# Altium PCB Mako DSP Pro R1.0.PcbDoc (part 2 of 2)
Units mil, origin at the board's own origin, x right, y up, seen from the top; angles counter-clockwise.
Board outline 4040 x 2100 mil, 4 copper layers (Top Layer, GND, Power, Bottom Layer); 159 components, 101 nets, 707 pads, 150 vias.
Unrouted connection lines stored in the file: 172.
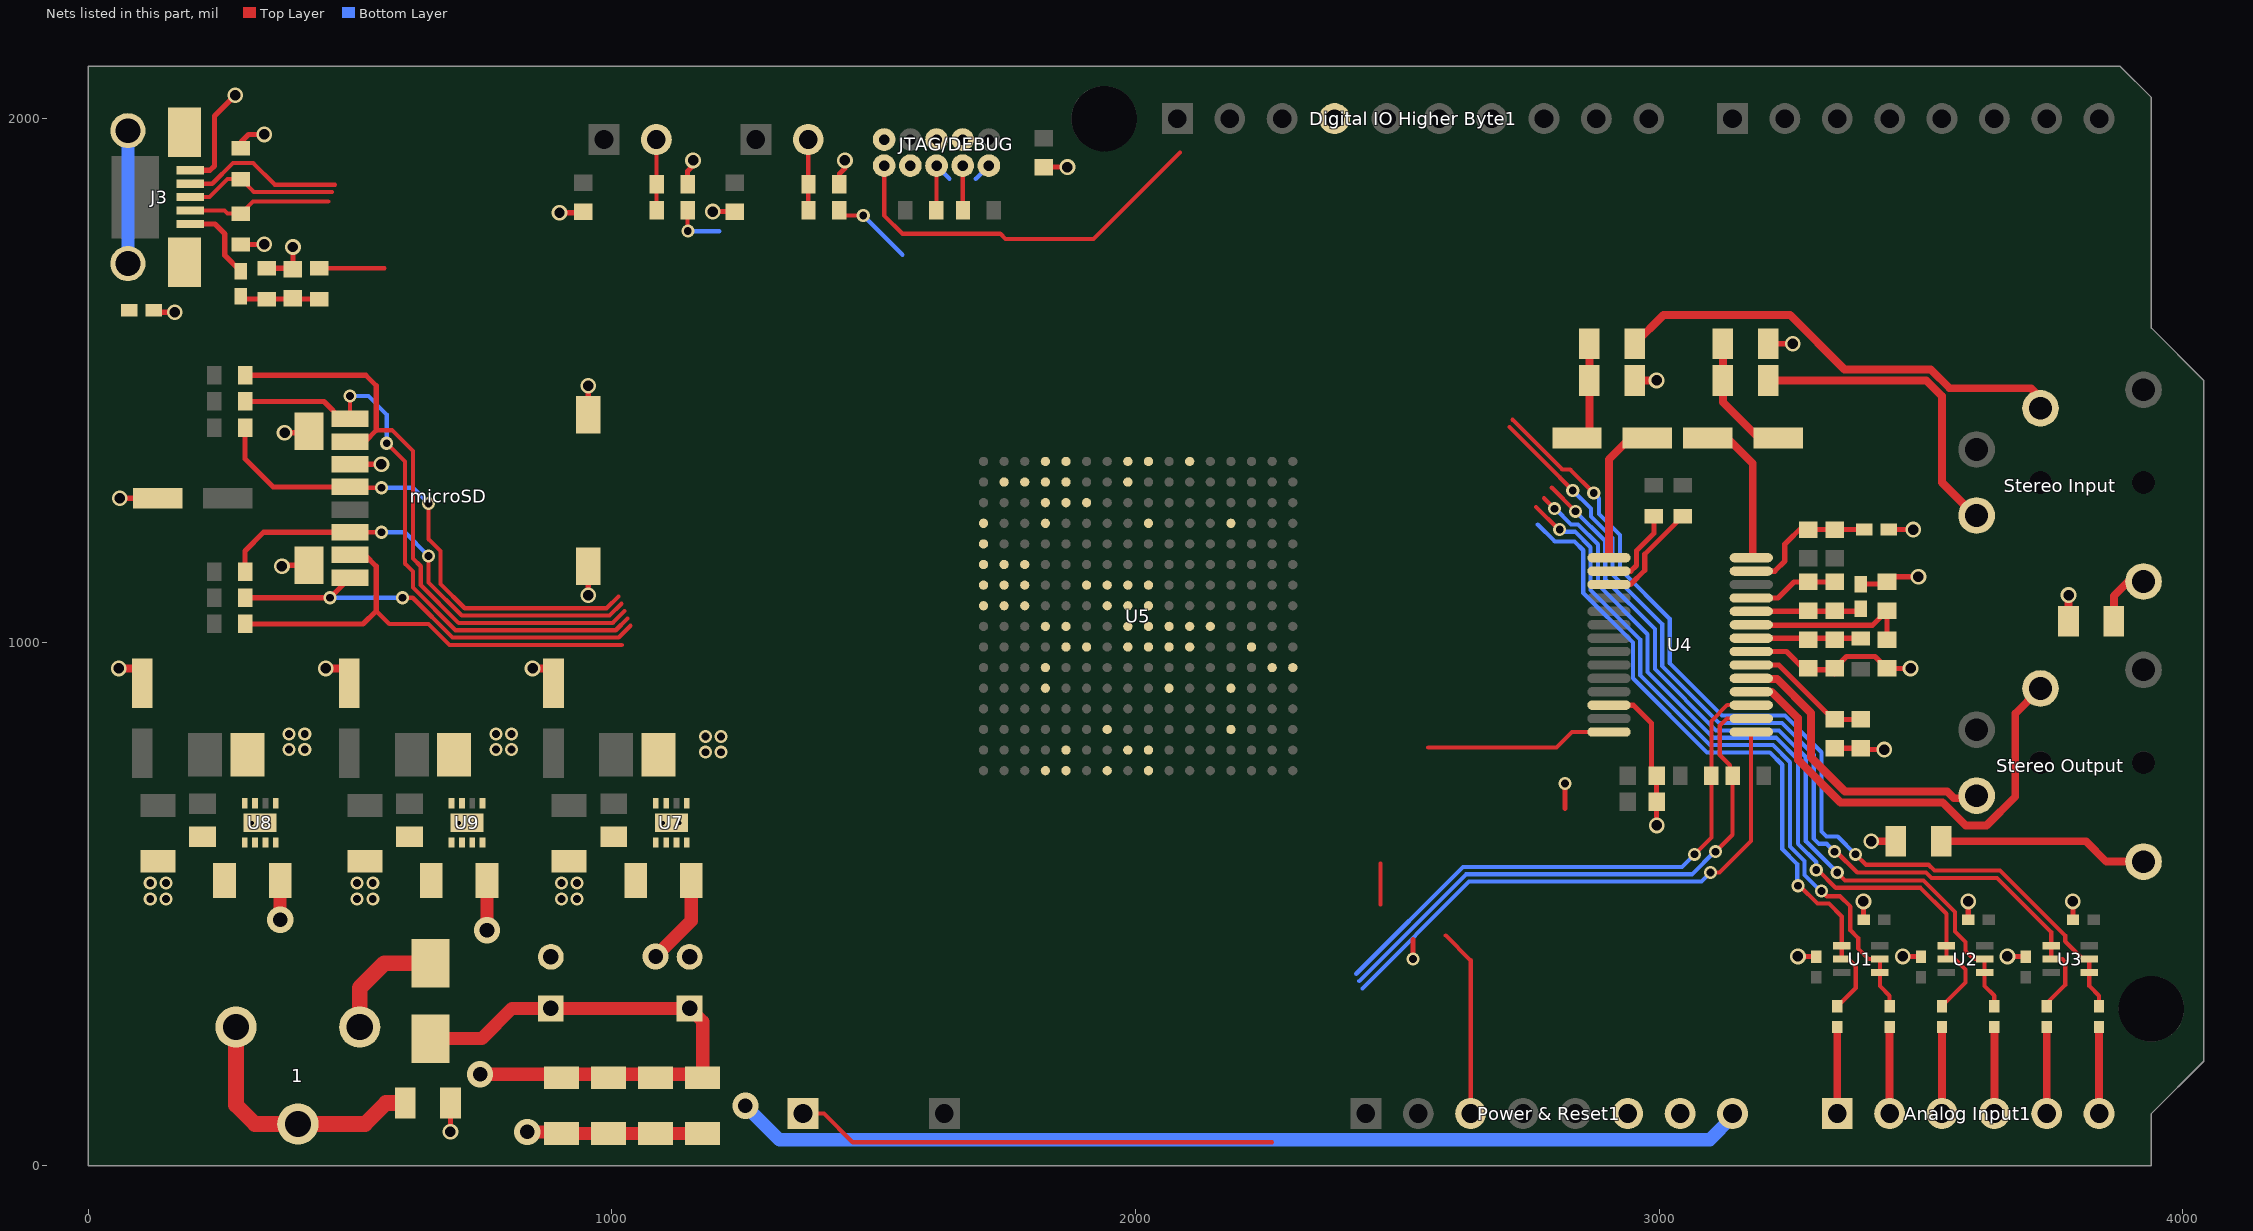
[diagram p4: the nets of this part, all layers, seen from the top]

## Via types
v1: diameter 30, hole 20, Top Layer to Bottom Layer, 78 vias
v2: diameter 25, hole 15, Top Layer to Bottom Layer, 56 vias
v3: diameter 50, hole 28, Top Layer to Bottom Layer, 10 vias
v4: diameter 19.68, hole 7.87, Top Layer to Bottom Layer, 6 vias

## Nets (pads, with @x,y where several pads share a name; then routed paths per layer and width w, separated by ;. In a path a pad name is that pad's centre, name@x,y a point inside that pad or via, vN(x,y) a via of type N, cw(c..) or ccw(c..) an arc to the next point about the centre after c; other vN are vias at no path point) (continued)
GND: "Digital IO Higher Byte1.4" "Power & Reset1.6" "Power & Reset1.7" C1.1 C2.1 C3.1 C4.1 C5.1 C6.1 C7.1 C8.1 C9.1 C12.1 C13.1 C16.1 C17.1 C18.1 C19.1 C21.1 C23.1 C24.1 C25.1 C26.1 C27.1 C28.1 C29.1 C30.2 C31.1 C32.2 C35.1 C36.1 C37.1 C38.1 C39.1 C40.1 C41.1 C42.1 C43.1 C44.1 C45.1 C46.1 C47.1 C48.1 C49.1 C50.1 C51.2 C52.2 C53.1 C54.1 C55.2 C56.1 C57.1 C58.2 C59.1 C60.1 C61.2 C62.1 C63.1 C64.1 C65.1 C66.1 C67.1 C68.1 C69.1 C70.1 C71.1 C72.1 C73.1 C74.1 C75.1 C76.1 C77.1 FB3.2 FB4.2 FB6.1 FB12.2 FB13.2 FB14.2 FB15.2 FB16.1 FB17.2 J3.5 JTAG/DEBUG.3 JTAG/DEBUG.5 JTAG/DEBUG.9 microSD.6 microSD.9 microSD.10 microSD.11 microSD.12 R8.1 R14.1 R16.1 R29.2 R32.2 R33.2 R47.1 Reset.2 U4.12 U4.21 U5.C4 U5.D13 U5.G6 U5.G7 U5.G8 U5.G9 U5.H7 U5.H8 U5.H9 U5.J8 U5.J9 U5.J10 U5.J11 U5.K8 U5.K9 U5.K10 U5.M13 U5.P7 U5.P13 U7.1 U7.4 U7.5 U7.9 U8.1 U8.4 U8.5 U8.9 U9.1 U9.4 U9.5 U9.9 U10.3 X1.2 X1.4 | length 3259.7
  Top Layer w10: v1(60,1275) C71.1@132.99,1275 ; FB12.2@129.17,1630 v1(165,1630) ; J3.5@195,1901.18 232.4,1901.18 240.96,1909.74 240.96,2004.74 v1(280.96,2044.74) ; R32.2@291.54,1943.54 291.54,1955.31 305.96,1969.74 v1(335.96,1969.74) ; R33.2@291.79,1759.74 v1(335.96,1759.74) ; R29.2@340.96,1714.27 388.99,1714.27 C68.1@390.96,1712.3 v1(390.96,1754.74) ; v1(370,1144.92) 372.05,1146.97 microSD.11@421.54,1146.97 ; v1(375,1399.92) 418.58,1399.92 microSD.12@421.54,1402.87 ; v1(560,1339.92) microSD.6@500.28,1339.88 ; v1(691.79,65) FB16.1@691.79,120 ; v1(900,1820) C27.1@942.56,1820 ; v1(955,1089.92) microSD.9@955,1145 ; microSD.10@955,1434.37 v1(955,1489.92) ; R14.1@1144.53,1875 1144.53,1899.53 1155,1910 v1(1155,1920) ; v1(1170,2555) R47.1@1214.53,2555 ; v1(1192.44,1822.44) C28.1@1235,1822.44 ; U10.3@1297.48,2505 v1(1380,2505) ; R16.1@1434.53,1875 1434.53,1894.53 1445,1905 v1(1445,1920) ; v1@1527.56,2405 C64.1@1570,2447.44 ; C63.1@1622.56,2555 C62.1@1622.56,2610 1650,2637.44 v1(1650,2645) ; v1(1685,2400) C50.1@1685,2437.56 ; C26.1@1747.56,2620 v1(1790,2620) ; C32.2@1825,1907.44 v1(1870,1907.44) ; v2(2530,395) 2530,432.56 ; 2820,682.72 v2(2820,730) ; U4.12@2904.17,879.84 2950.47,879.84 2985.16,845.16 2985.16,755.28 C8.1@2995.12,745.31 C9.1@2995.12,695.31 v1@2995.12,650.2 ; U4.21@3175.83,982.2 3242.8,982.2 3277.44,947.56 3327.44,947.56 C13.1@3335,940 ; C23.1@3213.31,1570 v1(3255,1570) ; v1(3265,400) 3299.69,400 C2.1@3300,399.68 ; C18.1@3335,797.44 C19.1@3385,797.44 ; C13.1@3335,950 3357.81,972.81 3412.19,972.81 C17.1@3435,950 v1(3480,950) ; FB17.2@3385,1111.18 3431.06,1111.18 C16.1@3435,1115.12 3445.04,1125.16 v1(3495.16,1125.16) ; C19.1@3387.44,795 v1(3430,795) ; v1(3390,505) 3390,470.32 C1.1@3390.31,470 ; FB13.2@3438.78,1215.16 v1(3485.16,1215.16) ; v1(3465,400) 3499.69,400 C4.1@3500,399.68 ; v1(3590,505) 3590,470.32 C3.1@3590.31,470 ; v1(3665,400) 3699.69,400 C6.1@3700,399.68 ; v1(3790,505) 3790,470.32 C5.1@3790.31,470 ; microSD.6@500.28,1339.88 microSD.6@500.28,1339.88
  Top Layer w15: v1(58.48,950) C58.2@103.48,950 ; v1(453.48,950) C61.2@503.48,950 ; v1(848.48,950) C55.2@888.48,950 ; C21.1@2953.31,1500 v1(2995,1500) ; v1(3405,620) FB15.2@3446.69,620 ; FB14.2@3781.69,1040 v1(3781.69,1090)
  Top Layer w25: v3(838.48,65) C74.1@900.33,65 ; C74.1@903.48,61.85 C7.1@993.48,61.85 C72.1@1083.48,61.85 C73.1@1173.48,61.85
  other v1: 2995.16,650.16 1520,2405
  other v2: 118.48,510 148.48,510 513.48,510 543.48,510 903.48,510 933.48,510 118.48,540 148.48,540 513.48,540 543.48,540 903.48,540 933.48,540 1178.48,790 1208.48,790 383.48,795 413.48,795 778.48,795 808.48,795 1178.48,820 1208.48,820 383.48,825 413.48,825 778.48,825 808.48,825
  other v4: 312.73,655 344.23,655 707.73,655 739.23,655 1097.73,655 1129.23,655
I2C_CLK: R1.1 U4.17 U5.K11 | length 1097.1
  Top Layer w8: v2(3067.72,595) 3099.69,626.96 R1.1@3099.69,745.16 3099.69,849.68 3129.84,879.84 U4.17@3175.83,879.84
  Bottom Layer w8: 2421.6,367 2625.42,570.82 3043.54,570.82 v2(3067.72,595)
I2C_DATA: R2.1 U4.16 U5.J12 | length 1100.6
  Top Layer w8: v2(3107.72,600) 3140.16,632.44 R2.1@3140.16,745.16 ; R2.1@3135.16,755.16 3135.16,765.16 3115.69,784.63 3115.69,840.68 3129.25,854.25 U4.16@3175.83,854.25
  Bottom Layer w8: 2427.4,353 2631.22,556.82 3062.72,556.82 3105.9,600 v2(3107.72,600)
LATCH_ENABLE: U4.15 U5.K14 | length 1067.2
  Top Layer w8: v2(3097.72,560) 3115,560 3175.16,620.16 3175.16,827.99 U4.15@3175.83,828.66
  Bottom Layer w8: 2433.2,339 2637.02,542.82 3080.54,542.82 v2(3097.72,560)
MODE: U4.14 U5.M10 | length 357.4
  Top Layer w8: 2559.05,799.05 2804.05,799.05 2833.66,828.66 U4.14@2904.17,828.66
Net1_1: 1.1 D2.2 | length 229.4
  Top Layer w30: 1.1@518.48,265 518.48,340 565.33,386.85 D2.2@653.48,386.85
Net1_2: 1.2 1.3 FB16.2 | length 503.3
  Top Layer w30: 1.2@282.26,265 282.26,116.22 318.52,79.96 1.3@400.37,79.96 528.44,79.96 568.48,120 FB16.2@605.17,120
"NetAnalog Input1_1": "Analog Input1.1" R34.1 | length 165.3
  Top Layer w15: 3340,100 R34.1@3340,265.32
"NetAnalog Input1_2": "Analog Input1.2" R35.1 | length 165.3
  Top Layer w15: 3440,100 R35.1@3440,265.32
"NetAnalog Input1_3": "Analog Input1.3" R36.1 | length 165.3
  Top Layer w15: 3540,100 R36.1@3540,265.32
"NetAnalog Input1_4": "Analog Input1.4" R37.1 | length 165.3
  Top Layer w15: 3640,100 R37.1@3640,265.32
"NetAnalog Input1_5": "Analog Input1.5" R38.1 | length 165.3
  Top Layer w15: 3740,100 R38.1@3740,265.32
"NetAnalog Input1_6": "Analog Input1.6" R39.1 | length 165
  Top Layer w15: 3840,100 R39.1@3840,265
NetC10_1: C10.1 C11.1 FB13.1 U4.27 | length 260.6
  Top Layer w10: U4.27@3175.83,1135.75 3220.56,1135.75 3240,1155.19 3240,1187.56 C10.1@3275,1222.56 ; C10.1@3285,1215.12 3285.04,1215.16 FB13.1@3391.54,1215.16
NetC12_2: C12.2 C13.2 R3.1 U4.22 | length 209.5
  Top Layer w10: U4.22@3175.83,1007.8 3384.29,1007.8 R3.1@3385,1007.09
NetC14_1: C14.1 C15.1 FB17.1 U4.24 | length 209.2
  Top Layer w10: U4.24@3175.83,1058.98 FB17.1@3385,1058.98
NetC14_2: C14.2 C15.2 U4.25 | length 171.8
  Top Layer w10: U4.25@3175.83,1084.57 3227.01,1084.57 3257.56,1115.12 C15.2@3335,1115.12
NetC16_2: C16.2 C17.2 U4.23 | length 325.8
  Top Layer w10: U4.23@3175.83,1033.39 3176.65,1032.56 3407.56,1032.56 C16.2@3435,1060 C17.2@3435,1005.12
NetC18_2: C18.2 C19.2 U4.20 | length 252.3
  Top Layer w10: U4.20@3175.83,956.61 3228.39,956.61 3270,915 3332.46,852.56 C19.2@3385,852.56
NetC20_1: C20.1 U4.1 | length 277.5
  Top Layer w15: U4.1@2904.17,1161.34 2904.17,1349.17 2945,1390 C20.1@2976.93,1390
NetC20_2: C20.2 C21.2 R4.1 | length 181.5
  Top Layer w15: C20.2@2863.07,1390 2866.69,1393.62 C21.2@2866.69,1500 R4.1@2866.69,1570
NetC22_1: C22.1 U4.28 | length 286.9
  Top Layer w15: C22.1@3093.07,1390 3130,1390 3178.66,1341.34 3178.66,1164.17 U4.28@3175.83,1161.34
NetC22_2: C22.2 C23.2 R5.1 | length 245.2
  Top Layer w15: C23.2@3121.69,1570 3121.69,1458.31 3190,1390 C22.2@3226.93,1390
NetC24_2: C24.2 FB2.2 U5.F3
NetC25_2: C25.2 FB1.2 U5.G3
NetC30_1: C30.1 U5.E1 X1.3
NetC31_2: C31.2 U5.D1 X1.1
NetC63_2: C63.2 C64.2 FB7.1 U10.6 U10.8 | length 372.5
  Top Layer w8: U10.6@1473.13,2505 1440,2505 1420,2525 1420,2575 1450,2605 U10.8@1482.52,2605 ; U10.6@1482.52,2505 1567.56,2505 1567.56,2554.88 C63.2@1567.44,2555 ; C64.2@1570,2502.56 FB7.1@1621.06,2502.56
NetC68_2: C68.2 FB10.1 R27.1 R29.1 | length 152.4
  Top Layer w10: FB10.1@290.96,1661.12 296.87,1655.21 R29.1@340.96,1655.21 R27.1@440.96,1655.21
NetDBGEN1_2: DBGEN.2 R15.2 R16.2 | length 134.5
  Top Layer w8: R15.2@1375,1825.47 DBGEN.2@1375,1960
NetFB3_1: FB3.1 U5.G1
NetFB4_1: FB4.1 U5.H3
NetFB10_2: FB10.2 J3.1 | length 157.7
  Top Layer w10: J3.1@195,1798.82 241.88,1798.82 260.96,1779.74 260.96,1738.36 FB10.2@290.96,1708.36
NetFB12_1: FB12.1 J3.6 J3.7 J3.8 J3.9 | length 253.9
  Bottom Layer w25: J3.7@75.91,1723.03 J3.8@75.91,1976.97
NetFB14_1: "Stereo Input.5" FB14.1 | length 136.5
  Top Layer w15: FB14.1@3868.31,1040 3868.31,1088.31 3896.02,1116.02 3945,1116.02
NetFB15_1: "Stereo Output.5" FB15.1 | length 422.8
  Top Layer w15: FB15.1@3538.31,620 3815,620 3853.98,581.02 3945,581.02
NetJ3_4: J3.4 U5.H2 | length 309.9
  Top Layer w8: J3.4@195,1875.59 236.81,1875.59 276.22,1915 315,1915 356.26,1873.74 471.51,1873.74
NetL1_1: L1.1 U7.7
NetL2_1: L2.1 U8.7
NetL3_1: L3.1 U9.7
NetR4_2: "Stereo Input.4" R4.2 | length 891.5
  Top Layer w15: R4.2@2953.31,1570 3008.31,1625 3250,1625 3354,1521 3518.7,1521 3554.7,1485 3709.88,1485 3748.15,1446.73
NetR5_2: "Stereo Input.1" R5.2 | length 634.6
  Top Layer w15: R5.2@3208.31,1500 R5.2@3213.31,1500 ; R5.2@3213.31,1486.69 R5.2@3213.31,1500 ; 3626.1,1242.01 3602.99,1242.01 3540,1305 3540,1470 3510,1500 R5.2@3213.31,1500
NetR6_2: R6.2 U4.2 | length 164.6
  Top Layer w10: U4.2@2904.17,1135.75 2945.75,1135.75 2956.51,1146.51 2956.51,1174.61 2990,1208.1 R6.2@2990,1240.47
NetR7_2: R7.2 U4.3 | length 212.7
  Top Layer w10: U4.3@2904.17,1110.16 2945.16,1110.16 2972.51,1137.51 2972.51,1167.98 R7.2@3045,1240.47
NetR8_2: R8.2 U5.H1
NetR13_2: R13.2 R14.2 TRST.2 | length 134.5
  Top Layer w8: R13.2@1085,1825.47 TRST.2@1085,1960
NetR15_1: R15.1 U5.L4 | length 155.7
  Top Layer w8: R15.1@1434.53,1825 1444.53,1815 v2(1480,1815)
  Bottom Layer w8: v2(1480,1815) 1555,1740
NetR19_1: R19.1 U7.8
NetR20_1: R20.1 U8.8
NetR21_1: R21.1 U9.8
NetR34_2: R34.2 U1.1 U1.2 | length 1300.6
  Top Layer w8: v2(3265,535) 3268.18,535 3302.18,501 3324,501 3348.58,476.42 U1.1@3348.58,420.59 U1.2@3348.58,395 3361.07,395 3375.31,380.76 3375.31,340 R34.2@3340,304.69
  Bottom Layer w8: 2768.18,1225 2800.68,1192.5 2838.1,1192.5 2855,1175.6 2855,1094.2 2949.72,999.49 2949.72,931.29 3091.29,789.72 3211.29,789.72 3235,766.01 3235,605.2 3263.5,576.7 3263.5,536.5 v2(3265,535)
NetR35_2: R35.2 U1.4 U1.5 | length 1347.6
  Top Layer w8: 2765,1258.18 2808.18,1215 v2(2810,1215) ; v2(3310,525) 3320,515 3345,515 3365,495 3365,450 3380,435 3380,415 3400,395 U1.5@3421.42,395 U1.4@3421.42,369.41 3421.42,343.58 3440,325 R35.2@3440,304.69
  Bottom Layer w8: v2(2810,1215) 2813.9,1211.1 2839.3,1211.1 2869,1181.4 2869,1100 2963.72,1005.28 2963.72,937.09 3097.09,803.72 3217.09,803.72 3250,770.8 3250,610 3277.5,582.5 3277.5,555.68 3308.18,525 v2(3310,525)
NetR36_2: R36.2 U2.1 U2.2 | length 1507.9
  Top Layer w8: 2780,1275 v2(2800,1255) ; v2(3300,565) 3303.18,565 3337.18,531 3499,531 3548.58,481.42 U2.1@3548.58,420.59 U2.2@3548.58,395 3565,395 3585,375 3585,350 3540,305 R36.2@3540,304.69
  Bottom Layer w8: v2(2800,1255) 2801.82,1255 2831.72,1225.1 2845.1,1225.1 2883,1187.2 2883,1109.9 2977.72,1015.18 2977.72,942.89 3102.89,817.72 3222.89,817.72 3265,775.6 3265,615 3300,580 v2(3300,565)
NetR37_2: R37.2 U2.4 U2.5 | length 1511
  Top Layer w8: 2795,1295 v2(2840,1250) ; v2(3340,560) 3355,545 3505,545 3565,485 3565,447.8 3585,427.8 3585,410 3600,395 U2.5@3621.42,395 U2.4@3621.42,369.41 3621.42,343.58 3640,325 R37.2@3640,304.69
  Bottom Layer w8: v2(2840,1250) 2897,1193 2897,1119.8 2991.72,1025.08 2991.72,948.69 3108.69,831.72 3228.69,831.72 3280,780.4 3280,620 v2(3340,560)
NetR38_2: R38.2 U3.1 U3.2 | length 1804.4
  Top Layer w8: 2714.2,1411 2810,1315.2 2810,1315 v2(2835,1290) ; v2(3335,600) 3338.18,600 3378.18,560 3509.8,560 3519.8,550 3645,550 3748.58,446.42 U3.1@3748.58,420.59 U3.2@3748.58,395 3770,395 3775.31,389.68 3775.31,345.32 3740,310 R38.2@3740,304.69
  Bottom Layer w8: v2(2835,1290) 2869.9,1255.1 2869.9,1239.9 2911,1198.8 2911,1129.7 3005.72,1034.98 3005.72,954.49 3114.49,845.72 3234.49,845.72 3295,785.2 3295,625 3305,615 3320,615 v2(3335,600)
NetR39_2: R39.2 U3.4 U3.5 | length 1826.6
  Top Layer w8: 2720,1425 2815,1330 2830,1330 v2(2875,1285) ; v2(3375,595) 3395,575 3514.6,575 3525.6,564 3651,564 3775.31,439.68 3775.31,428.93 3809.24,395 U3.5@3821.42,395 U3.4@3821.42,369.41 3821.42,343.58 3840,325 R39.2@3840,304.69
  Bottom Layer w8: v2(2875,1285) 2885,1275 2885,1245 2905,1225 2905,1224.6 2925,1204.6 2925,1139.8 3020,1044.8 3020,960 3120,860 3240,860 3310,790 3310,638.44 3319.38,629.06 3340.94,629.06 v2(3375,595)
NetR40_2: microSD.1 R40.2 U5.T9 | length 831.4
  Top Layer w8: v2(600,1085) 619.8,1085 695.88,1008.92 1013.12,1008.92 1035.72,1031.52
  Top Layer w10: R40.2@299.53,1084.92 v2(461.85,1084.92) microSD.1@500.28,1123.35
  Bottom Layer w8: v2@461.93,1085 v2(600,1085)
  Bottom Layer w10: v2(461.85,1084.92) v2@461.93,1085
NetR41_2: microSD.2 R41.2 U5.R9 | length 900.4
  Top Layer w8: 550,1059.92 574.92,1035 650,1035 690.08,994.92 1018.92,994.92
  Top Layer w10: R41.2@299.53,1034.92 525,1034.92 550,1059.92 550,1144.92 528.27,1166.65 microSD.2@500.28,1166.65
NetR42_2: microSD.3 R42.2 U5.T4 | length 878
  Top Layer w8: microSD.3@500.28,1209.96 v2(560,1210) ; v2(650,1165) 650,1114.2 713.27,1050.92 995.72,1050.92 1018.32,1073.52
  Top Layer w10: R42.2@299.53,1134.92 299.53,1174.45 335.04,1209.96 microSD.3@500.28,1209.96
  Bottom Layer w8: v2(560,1210) 605,1210 v2(650,1165)
NetR43_2: microSD.5 R43.2 U5.D4 | length 974.6
  Top Layer w8: microSD.5@501.85,1295 v2(560,1295) ; v2(650,1265) 650,1196.82 672.5,1174.32 672.5,1111.49 719.07,1064.92 989.92,1064.92 1012.52,1087.52
  Top Layer w10: R43.2@299.53,1409.92 299.53,1350.39 353.35,1296.57 microSD.5@500.28,1296.57
  Bottom Layer w8: v2(560,1295) 620,1295 v2(650,1265)
NetR44_2: microSD.7 R44.2 U5.T7 | length 1179.3
  Top Layer w8: 550,1404.92 580.08,1404.92 620,1365 620,1160 635,1145 635,1109.4 707.48,1036.92 1001.52,1036.92 1024.12,1059.52
  Top Layer w10: R44.2@299.53,1509.92 530,1509.92 550,1489.92 550,1404.92 528.27,1383.19 microSD.7@500.28,1383.19
NetR45_2: microSD.8 R45.2 U5.R8 | length 1121.3
  Top Layer w8: microSD.8@500,1426.77 v2(500,1470) ; v2@577.5,1372.5 605,1345 605,1150 620,1135 620,1104.6 701.68,1022.92 1007.32,1022.92 1029.92,1045.52
  Top Layer w10: R45.2@299.53,1459.92 450.08,1459.92 microSD.8@485,1425
  Bottom Layer w8: v2(500,1470) 535,1470 570,1435 v2(570,1380)
NetRTCALARM1_1: RTCALARM1.1 U5.A11 | length 918.5
  Top Layer w8: RTCALARM1.1@1365,100 1405,100 1460,45 2260.7,45
"NetStereo Output1_1": "Stereo Output.1" U4.19 | length 594.9
  Top Layer w15: U4.19@3175.83,931.02 3176.85,930 3225,930 3290,865 3290,780 3355,715 3550,715 3562.99,702.01 3626.1,702.01
"NetStereo Output1_4": "Stereo Output.4" U4.18 | length 924.4
  Top Layer w15: U4.18@3175.55,905.16 U4.18@3175.83,905.43 3214.57,905.43 3265,855 3265,775.3 3346.3,694 3541.3,694 3585.3,650 3625,650 3680,705 3680,863.58 3723.15,906.73 3748.15,906.73
NetU5_A4: U5.A4
NetU5_A5: U5.A5
NetU5_A9: U5.A9
NetU5_B3: U5.B3
NetU5_B5: U5.B5
NetU5_C5: U5.C5
NetU5_C6: U5.C6
NetU5_L15: U5.L15
NetU5_L16: U5.L16
RESET: "Power & Reset1.3" C29.2 JTAG/DEBUG.10 R12.1 Reset.1 U5.D9 | length 1184.4
  Top Layer w8: JTAG/DEBUG.10@1520,1910 1520,1815 1555,1780 1741.82,1780 1751.82,1770 1920,1770 2085,1935 ; 2467.83,499.45 2467.83,577.17 ; 2592.56,440 2640,392.56 2640,100
RTCX1: C35.2 U5.A8 X2.1
RTCX2: C36.2 U5.B8 X2.2
TCK/SWDCLK: JTAG/DEBUG.4 R18.1 U5.J5 | length 84.5
  Top Layer w8: R18.1@1670,1825.47 JTAG/DEBUG.4@1670,1910
TDI: JTAG/DEBUG.8 U5.J4
TDO/SWO: JTAG/DEBUG.6 R17.1 U5.K5 | length 119.9
  Top Layer w8: R17.1@1620,1825.47 JTAG/DEBUG.6@1620,1910
  Bottom Layer w8: JTAG/DEBUG.6@1620,1910 1645,1885
TMS/SWDIO: JTAG/DEBUG.2 U5.K6 | length 35.4
  Bottom Layer w8: 1695,1885 JTAG/DEBUG.2@1720,1910
TRST: R13.1 U5.M4 | length 100.2
  Top Layer w8: R13.1@1144.53,1825 1144.53,1785.47 v2(1145,1785)
  Bottom Layer w8: v2(1145,1785) 1205,1785
USB0_N: J3.2 R33.1 U5.G2 | length 275.3
  Top Layer w8: J3.2@195,1824.41 260.09,1824.41 265.96,1818.54 R33.1@291.54,1818.54 314.73,1841.74 458.26,1841.74
USB0_P: J3.3 R32.1 U5.F2 | length 295.3
  Top Layer w8: J3.3@195,1850 231.47,1850 265.96,1884.49 R32.1@291.54,1884.49 316.28,1859.74 465.72,1859.74
USB0_PPWR: R47.2 U5.T5 U10.1 | length 86.4
  Top Layer w8: R47.2@1215,2614.53 1235.47,2614.53 1245,2605 U10.1@1297.48,2605
USB0_PPWR_FAULT: R22.2 U5.R5 U10.2 | length 101.3
  Top Layer w8: R22.2@1215,2509.53 1235.47,2530 1272.48,2530 U10.2@1297.48,2555
USB0_VBUS: FB7.2 R27.2 U5.F1 U6.1 U6.2 U6.4 U6.5 | length 347.4
  Top Layer w8: R27.2@440.96,1714.27 565.73,1714.27 ; FB7.2@1625,2451.38 1646.38,2451.38 1655,2460 1655,2480 1668.58,2493.58 U6.1@1694.41,2493.58 U6.2@1720,2493.58 U6.5@1720,2566.42 U6.4@1745.59,2566.42
VDDA: C33.2 C34.2 FB5.2 U5.B4
VIN: "Power & Reset1.8" C7.2 C51.1 C52.1 C53.2 C56.2 C59.2 C72.2 C73.2 C74.2 D2.1 U7.2 U7.3 U8.2 U8.3 U9.2 U9.3 | length 3353.2
  Top Layer w25: v3(366.63,470) C56.2@366.63,545 ; D2.1@653.48,243.15 751.63,243.15 809.27,300.79 C52.1@883.48,300.79 C51.1@1148.48,300.79 1173.48,275.79 C73.2@1173.48,168.15 ; v3(748.48,175) C73.2@1166.63,175 ; v3(761.63,450) C59.2@761.63,545 ; v3(1083.48,400) 1151.63,468.15 C53.2@1151.63,545
  Bottom Layer w25: v3(1255,115) 1320,50 3096.5,50 3140,93.5
VSSA: C33.1 C34.1 FB6.2 U5.B2
pads on no net: "Digital IO Higher Byte1.1" "Digital IO Higher Byte1.2" "Digital IO Higher Byte1.3" "Digital IO Higher Byte1.5" "Digital IO Higher Byte1.6" "Digital IO Higher Byte1.7" "Digital IO Higher Byte1.8" "Digital IO Higher Byte1.9" "Digital IO Higher Byte1.10" "Digital IO Lower Byte1.1" "Digital IO Lower Byte1.2" "Digital IO Lower Byte1.3" "Digital IO Lower Byte1.4" "Digital IO Lower Byte1.5" "Digital IO Lower Byte1.6" "Digital IO Lower Byte1.7" "Digital IO Lower Byte1.8" "Power & Reset1.1" "Stereo Input.3" "Stereo Input.6" "Stereo Input." "Stereo Output.3" "Stereo Output.6" "Stereo Output." J3.GND JTAG/DEBUG.1@1795.59,1991.5 JTAG/DEBUG.7 U5.A1 U5.A2 U5.A3 U5.A6 U5.A7 U5.A10 U5.A12 U5.A13 U5.A14 U5.A15 U5.A16 U5.B1 U5.B6 U5.B7 U5.B9 U5.B11 U5.B12 U5.B13 U5.B15 U5.B16 U5.C1 U5.C2 U5.C3 U5.C7 U5.C8 U5.C9 U5.C10 U5.C11 U5.C13 U5.C14 U5.C15 U5.C16 U5.D2 U5.D3 U5.D5 U5.D6 U5.D8 U5.D10 U5.D11 U5.D12 U5.D14 U5.D15 U5.D16 U5.E2 U5.E3 U5.E4 U5.E5 U5.E6 U5.E7 U5.E8 U5.E9 U5.E10 U5.E11 U5.E13 U5.E14 U5.E15 U5.E16 U5.F4 U5.F5 U5.F6 U5.F12 U5.F14 U5.F15 U5.F16 U5.G4 U5.G5 U5.G12 U5.G13 U5.G14 U5.G15 U5.G16 U5.H5 U5.H6 U5.H11 U5.H12 U5.H13 U5.H14 U5.H15 U5.H16 U5.J1 U5.J2 U5.J3 U5.J13 U5.J14 U5.J15 U5.J16 U5.K1 U5.K2 U5.K3 U5.K4 U5.K12 U5.K13 U5.K15 U5.K16 U5.L1 U5.L2 U5.L5 U5.L6 U5.L11 U5.L12 U5.L13 U5.L14 U5.M1 U5.M2 U5.M3 U5.M5 U5.M6 U5.M7 U5.M8 U5.M9 U5.M12 U5.M14 U5.M15 U5.M16 U5.N1 U5.N2 U5.N3 U5.N4 U5.N5 U5.N6 U5.N8 U5.N9 U5.N10 U5.N11 U5.N12 U5.N14 U5.N15 U5.N16 U5.P1 U5.P2 U5.P3 U5.P4 U5.P5 U5.P6 U5.P8 U5.P9 U5.P10 U5.P11 U5.P12 U5.P14 U5.P15 U5.P16 U5.R1 U5.R2 U5.R3 U5.R4 U5.R6 U5.R7 U5.R10 U5.R11 U5.R12 U5.R13 U5.R14 U5.R15 U5.R16 U5.T1 U5.T2 U5.T3 U5.T6 U5.T8 U5.T10 U5.T11 U5.T12 U5.T13 U5.T14 U5.T15 U5.T16 U10.4 U10.5 WAKEUP1.1
copper on no net: | length 1241
  Top Layer w8: 1635,100 1695,100 1735,60
  Top Layer w10: 334.53,875 358.23,898.7 358.23,936.5
  Top Layer w25: 275,939.88 v1(275,990)
  Bottom Layer w8: 2410,395 2760,745 ; 2415.8,381 2775,740.2

## Polygon pours and split planes (outlines as drawn)
NetL1_1 on Top Layer "Power Plane-No Net" (solid, remove dead copper, pour order 40): 1048.48,845 1138.48,845 1138.48,715 1118.48,715 1118.48,675 1088.48,675 1088.48,710 1048.48,710
GND on Top Layer "Power Plane-No Net" (solid, remove dead copper, pour order 28): 1093.48,495 853.48,495 853.48,650 968.48,650 968.48,600 1063.48,600 1063.48,635 1093.48,635
GND on Top Layer "Power Plane-No Net" (solid, remove dead copper, pour order 29): 703.48,495 463.48,495 463.48,650 578.48,650 578.48,600 673.48,600 673.48,635 703.48,635
NetL3_1 on Top Layer "Power Plane-No Net" (solid, remove dead copper, pour order 41): 658.48,845 748.48,845 748.48,715 728.48,715 728.48,675 698.48,675 698.48,710 658.48,710
GND on Top Layer "Power Plane-No Net" (solid, remove dead copper, pour order 30): 308.48,495 68.48,495 68.48,650 183.48,650 183.48,600 278.48,600 278.48,635 308.48,635
NetR19_1 on Top Layer "Power Plane-No Net" (solid, remove dead copper, pour order 37): 968.48,665 968.48,600 1063.48,600 1063.48,635 1093.48,635 1093.48,710 1033.48,710 1033.48,665 968.48,665
NetR21_1 on Top Layer "Power Plane-No Net" (solid, remove dead copper, pour order 38): 578.48,665 578.48,600 673.48,600 673.48,635 703.48,635 703.48,710 643.48,710 643.48,665 578.48,665
AVDD on Top Layer "Power Plane-No Net" (solid, remove dead copper, pour order 31): 853.48,650 968.48,650 968.48,665 1033.48,665 1033.48,735 1048.48,735 1048.48,845 853.48,845
DVDD on Top Layer "Power Plane-No Net" (solid, remove dead copper, pour order 32): 463.48,650 578.48,650 578.48,665 643.48,665 643.48,735 658.48,735 658.48,845 463.48,845
NetL2_1 on Top Layer "Power Plane-No Net" (solid, remove dead copper, pour order 42): 263.48,845 353.48,845 353.48,715 333.48,715 333.48,675 303.48,675 303.48,710 263.48,710
NetR20_1 on Top Layer "Power Plane-No Net" (solid, remove dead copper, pour order 39): 183.48,665 183.48,600 278.48,600 278.48,635 308.48,635 308.48,710 248.48,710 248.48,665 183.48,665
5VCC on Top Layer "Power Plane-No Net" (solid, remove dead copper, pour order 33): 68.48,650 183.48,650 183.48,665 248.48,665 248.48,735 263.48,735 263.48,845 68.48,845
VIN on Top Layer "Power Plane-No Net" (solid, remove dead copper, pour order 25): 1093.48,495 1188.48,495 1188.48,600 1128.48,600 1128.48,635 1093.48,635
VIN on Top Layer "Power Plane-No Net" (solid, remove dead copper, pour order 26): 703.48,495 798.48,495 798.48,600 738.48,600 738.48,635 703.48,635
VIN on Top Layer "Power Plane-No Net" (solid, remove dead copper, pour order 27): 308.48,495 403.48,495 403.48,600 343.48,600 343.48,635 308.48,635
NetFB12_1 on Top Layer "Power Plane-No Net" (solid, remove dead copper, pour order 23): 36.54,1604.02 36.54,2064.02 251.54,2064.02 251.54,1604.02
GND on Top Layer "Power Plane-No Net" (solid, remove dead copper, pour order 35): 683.48,630 745,630 745,600 798.48,600 798.48,495 848.48,495 848.48,845 758.48,845 758.48,680 683.48,680
GND on Top Layer "Power Plane-No Net" (solid, remove dead copper, pour order 36): 288.48,630 350,630 350,600 403.48,600 403.48,495 453.48,495 453.48,845 363.48,845 363.48,680 288.48,680
GND on Top Layer "Power Plane-No Net" (solid, remove dead copper, pour order 34): 1073.48,630 1135,630 1135,600 1188.48,600 1188.48,495 1238.48,495 1238.48,845 1148.48,845 1148.48,680 1073.48,680
GND on GND (split plane): 3919.9,2031.68 3919.9,1600 3920.29,1596.08 3921.43,1592.31 3923.29,1588.83 3925.79,1585.79 4019.9,1491.68 4019.9,208.32 3925.79,114.21 3923.29,111.17 3921.43,107.69 3920.29,103.92 3919.9,100 3919.9,20.1 20.1,20.1 20.1,2079.9 3871.68,2079.9
no net on Power (split plane): 1724.39,1989.98 1729.02,1988.86 1733.42,1987.04 1737.48,1984.55 1741.1,1981.46 1744.2,1977.84 1746.69,1973.78 1748.51,1969.38 1749.62,1964.75 1749.99,1960 1749.62,1955.25 1748.51,1950.62 1746.69,1946.22 1744.2,1942.16 1741.1,1938.54 1737.48,1935.45 1733.42,1932.96 1729.02,1931.14 1724.39,1930.02 1719.64,1929.65 1714.9,1930.02 1710.27,1931.14 1705.87,1932.96 1701.81,1935.45 1698.18,1938.54 1695.09,1942.16 1692.6,1946.22 1690.78,1950.62 1689.67,1955.25 1689.3,1960 1689.67,1964.75 1690.78,1969.38 1692.6,1973.78 1695.09,1977.84 1698.18,1981.46 1701.81,1984.55 1705.87,1987.04 1710.27,1988.86 1714.9,1989.98 1719.64,1990.35
AVDD on Power (split plane): 1184.9,265.1 1115.1,265.1 1115.1,334.9 1184.9,334.9
AVDD on Power (split plane): 3919.9,1600 3920.29,1596.08 3921.43,1592.31 3923.29,1588.83 3925.79,1585.79 4019.9,1491.68 4019.9,208.32 3925.79,114.21 3923.29,111.17 3921.43,107.69 3920.29,103.92 3919.9,100 3919.9,20.1 1355.1,20.1 1355.1,250 1354.71,251.95 1353.6,253.6 1148.61,458.6 1148.6,458.6 998.6,608.6 996.95,609.71 995,610.1 860.1,610.1 860.1,822.89 977.11,939.9 1142.89,939.9 1264.9,817.89 1264.9,672.76 1265.29,670.81 1266.4,669.15 1619.44,316.11 1620.04,315.71 1619.9,315 1620.29,313.05 1621.4,311.4 1623.05,310.29 1625,309.9 2405,309.9 2406.95,310.29 2408.6,311.4 2463.6,366.4 2463.61,366.4 2632.11,534.9 2860,534.9 2861.95,535.29 2863.6,536.4 2938.6,611.4 2939.71,613.05 2940.1,615 2940.1,817.89 3083.6,961.4 3084.71,963.05 3085.1,965 3085.1,1712.89 3147.11,1774.9 3919.9,1774.9
DVDD on Power (split plane): 3919.9,2031.68 3919.9,1785.1 3145,1785.1 3143.05,1784.71 3141.4,1783.6 3076.4,1718.6 3075.29,1716.95 3074.9,1715 3074.9,967.11 2931.4,823.6 2930.29,821.95 2929.9,820 2929.9,617.11 2857.89,545.1 2630,545.1 2628.05,544.71 2626.4,543.6 2456.4,373.61 2456.4,373.6 2402.89,320.1 1628.07,320.1 1627.76,321.66 1626.65,323.31 1275.1,674.87 1275.1,820 1274.71,821.95 1273.6,823.6 1148.6,948.6 1146.95,949.71 1145,950.1 975,950.1 973.05,949.71 971.4,948.6 851.4,828.6 850.29,826.95 849.9,825 849.9,610.1 20.1,610.1 20.1,2079.9 3871.68,2079.9
no net on Power (split plane): 919.9,265.1 850.1,265.1 850.1,334.9 919.9,334.9
VIN on Power (split plane): 1141.4,451.4 1141.4,451.39 1344.9,247.89 1344.9,20.1 20.1,20.1 20.1,599.9 992.89,599.9

## Keep-outs
Keep-Out Layer:
  lines w10: 3870,2075 25,2075 25,25 3915,25 3915,115 4015,215 4015,1490 3915,1590 3915,2030

## Other copper
Power (plane layer: these items are gaps in the copper):
  circle w10: c1719.64,1960 r35.36
  lines w10: 0,605 995,605 1145,455 1350,250 1350,0 ; 855,605 855,825 975,945 1145,945 1270,820 1270,672.76 1623.05,319.71 ; 1625,315 2405,315 2460,370 2630,540 2860,540 2935,615 2935,820 3080,965 3080,1715 3145,1780 3940,1780 ; 845,260 925,260 925,340 845,340 845,260 ; 1110,260 1110,340 1190,340 1190,260 1110,260

## Silkscreen, mask and mechanical layers (free items; w line width, h text height)
Top Overlay:
  text "Designed By" at 3305,1770 h75
  text "Adam J. Vadala-Roth" at 3305,1710 h75
  text "www.MakoDSP.io" at 3305,1655 h75
Bottom Overlay:
  region: 3068 vertices and 0 holes, not listed, extent 391.96,517.18 1557.79,1568.59
  text "www.MakoDSP.io" at 1835,430 h100
  text "d" at 1860,250 h350
Mechanical 15:
  circle w5: c3940,300 r62.5
  circle w5: c1940,2000 r62.5
  lines w5: 3880,2100 0,2100 0,0 3940,0 3940,100 4040,200 4040,1500 3940,1600 3940,2040

## Text inside footprints (layer, text, board x,y; h text height)
"Analog Input1": Top Overlay "A5" at 3865,160 h78.74 r90; Top Overlay "A4" at 3765,160 h78.74 r90; Top Overlay "A3" at 3665,160 h78.74 r90; Top Overlay "A2" at 3560,160 h78.74 r90; Top Overlay "A1" at 3460,160 h78.74 r90; Top Overlay "A0" at 3360,160 h78.74 r90
C51: Top Overlay "+" at 1238.48,280 h59.06 r90
C52: Top Overlay "+" at 973.48,280 h59.06 r90
"Digital IO Higher Byte1": Top Overlay "8" at 3005,1890 h78.74 r90; Top Overlay "~ 9" at 2905,1835 h78.74 r90; Top Overlay "~ 10" at 2805,1795 h78.74 r90; Top Overlay "~ 11" at 2700,1795 h78.74 r90; Top Overlay "12" at 2605,1855 h78.74 r90; Top Overlay "~ 13" at 2505,1800 h78.74 r90; Top Overlay "GND" at 2405,1805 h78.74 r90; Top Overlay "AREF" at 2300,1770 h78.74 r90; Top Overlay "SDA" at 2195,1810 h78.74 r90; Top Overlay "SCL" at 2105,1815 h78.74 r90
"Digital IO Lower Byte1": Top Overlay "RX 0" at 3865,1785 h78.74 r90; Top Overlay "TX 1" at 3760,1790 h78.74 r90; Top Overlay "2" at 3665,1890 h78.74 r90; Top Overlay "~ 3" at 3565,1835 h78.74 r90; Top Overlay "4" at 3465,1890 h78.74 r90; Top Overlay "~ 5" at 3365,1835 h78.74 r90; Top Overlay "~ 6" at 3265,1835 h78.74 r90; Top Overlay "7" at 3165,1895 h78.74 r90
"Power & Reset1": Top Overlay "VIN" at 3165,170 h78.74 r90; Top Overlay "GND" at 3065,170 h78.74 r90; Top Overlay "GND" at 2960,170 h78.74 r90; Top Overlay "5V" at 2860,170 h78.74 r90; Top Overlay "3.3V" at 2765,170 h78.74 r90; Top Overlay "RESET" at 2660,170 h78.74 r90; Top Overlay "IOREF" at 2565,170 h78.74 r90